# Altium PCB BEEHIVE.PcbDoc
Units mm, origin at the board's own origin, x right, y up, seen from the top; angles counter-clockwise.
Board outline 75 x 100 mm, 2 copper layers (Top Layer, Bottom Layer); 8 components, 8 nets, 61 pads, 0 vias.
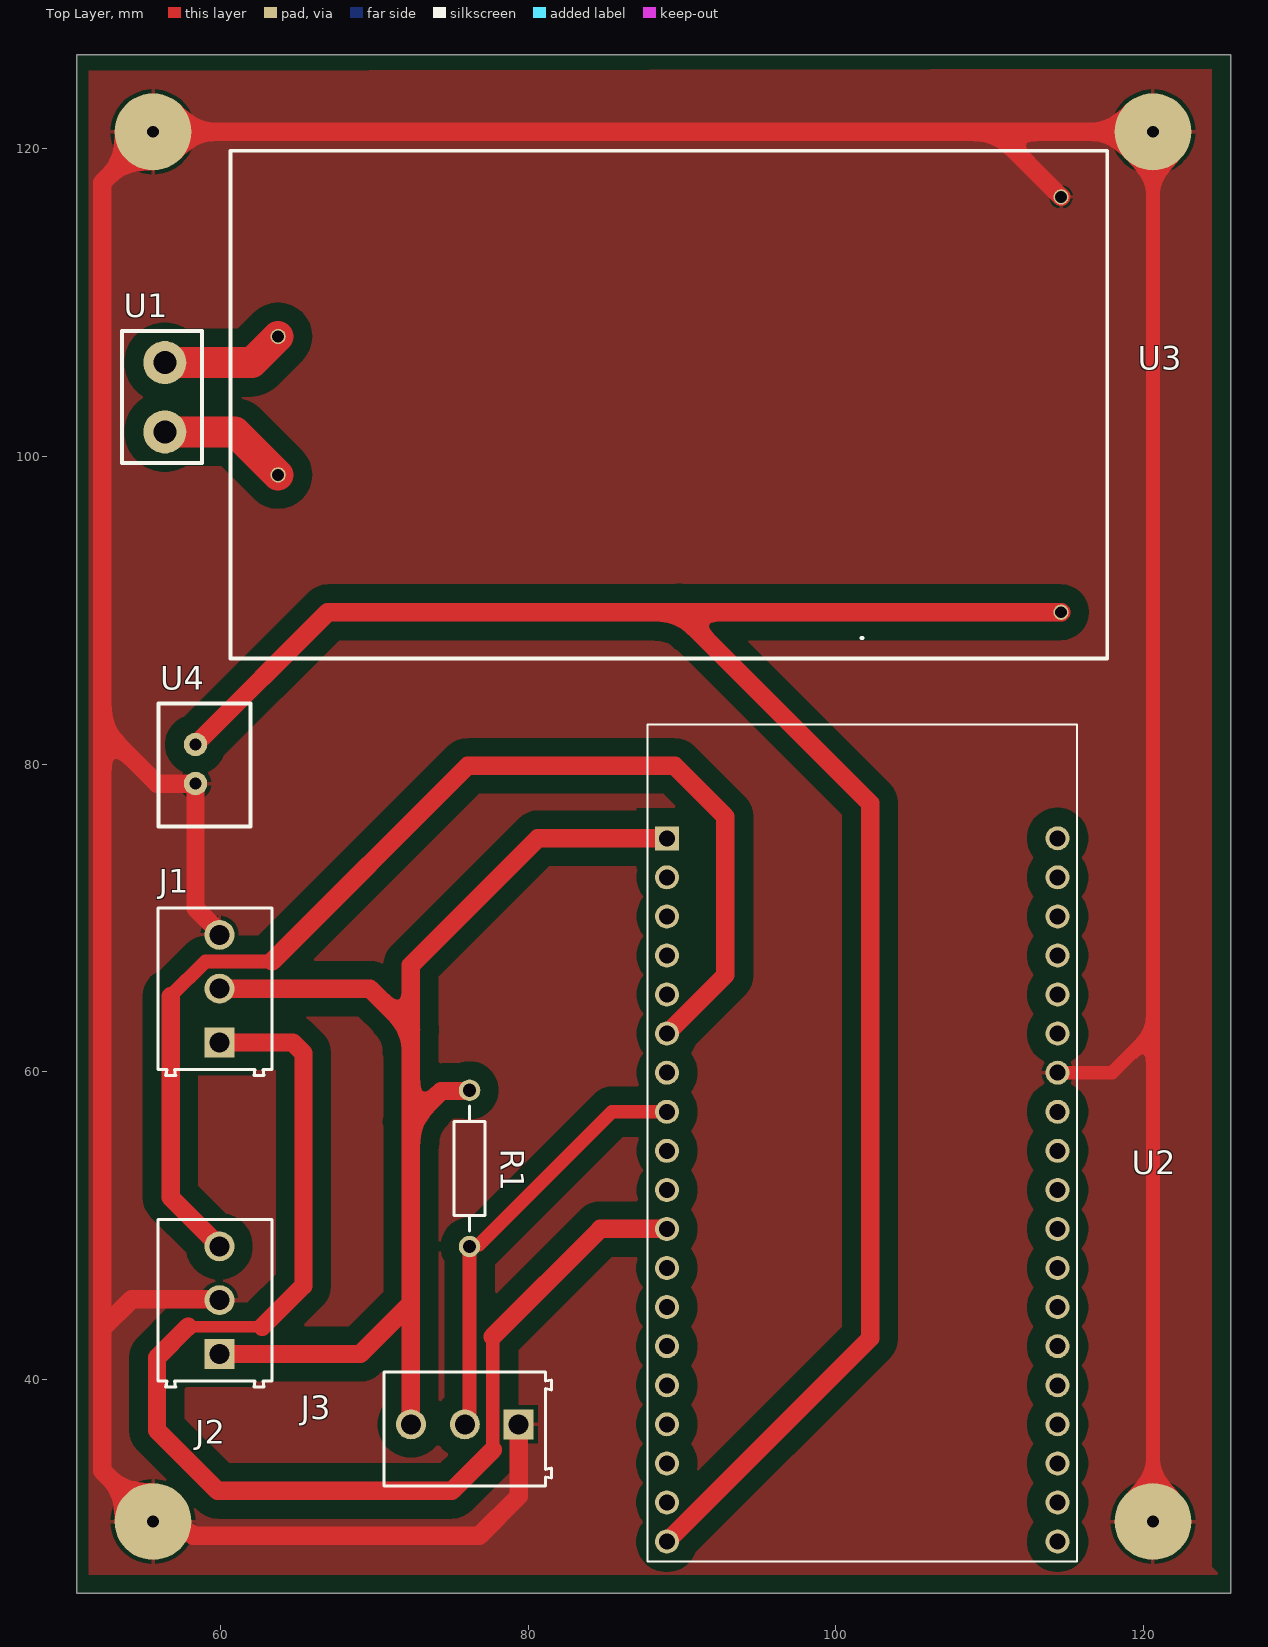
[diagram p0: Top Layer view]
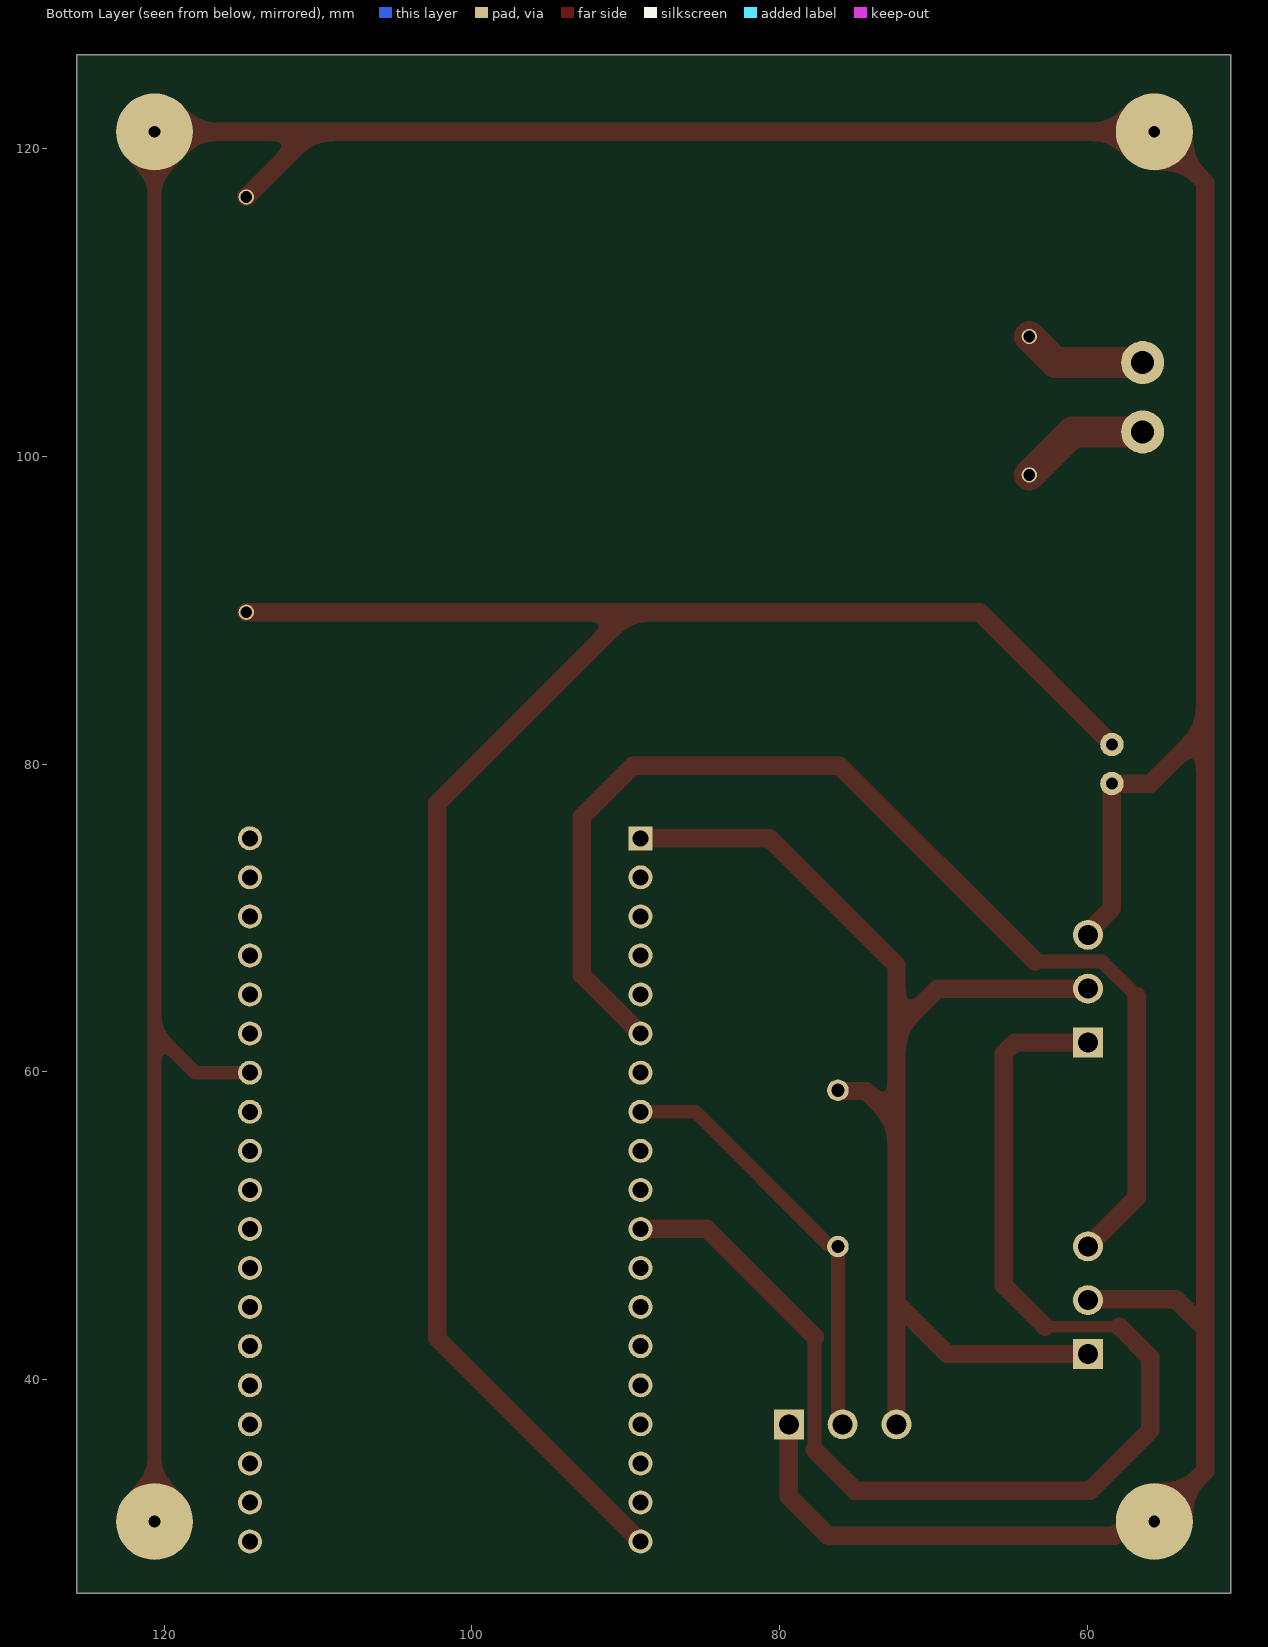
[diagram p1: Bottom Layer view, seen from below]

## Layer stack, top to bottom
Top Solder: solder mask 0.0102, Solder Resist, Dk 3.5
Top Layer: signal copper 0.0356
Dielectric 1: dielectric 0.32, FR-4, Dk 4.8
Bottom Layer: signal copper 0.0356
Bottom Solder: solder mask 0.0102, Solder Resist, Dk 3.5

## Board outline
50.673,26.111 50.673,126.111 125.673,126.111 125.673,26.111

## Design rules (kind name [scope] priority, off if disabled: settings)
Clearance [All] p1: gap=0.254 ignorepadtopadclearanceinfootprint=FALSE except(0: Arc-Hole Track-Hole SMDPad-Hole THPad-Hole Via-Hole Fill-Hole Poly-Hole Region-Hole Text-Hole; 1.2: Arc-Fill Arc-Poly Arc-Region Track-Fill Track-Poly Track-Region SMDPad-Fill SMDPad-Poly SMDPad-Region THPad-Fill THPad-Poly THPad-Region Via-Fill Via-Poly Via-Region; 1.25: Fill-Fill Fill-Poly Fill-Region Poly-Poly Poly-Region Region-Region)
PolygonConnect [All] p1: connectstyle=Relief reliefconductorwidth=0.254 reliefentries=4 polygonreliefangle="90 Angle" airgapwidth=0.254
RoutingLayers [All] p1: top layer_v5=TRUE bottom layer_v5=FALSE
RoutingVias [All] p1: holewidth=0.711 width=1.27 viastyle="Through Hole" minholewidth=0.711 minwidth=1.27 maxholewidth=0.711 maxwidth=1.27
SolderMaskExpansion [All] p1: expansion=0.102 istentingtop=FALSE
Width [All] p1: maxlimit=2 minlimit=0.75 preferedwidth=0.75 minimp=50.000000 maximp=50.000000 favimp=50.000000
29 further rules are at their usual default settings.

## Components (designator, comment, footprint, x,y, rotation, side; value= is the part's Value field where it differs from the comment)
J1 "DHT11 MODULE" 691214110003 59.644,65.405 r90 top
J2 "IR SENSOR" 691214110003 59.644,45.156 r90 top
J3 "DS18B20" 691214110003 75.89,36.784 r180 top
R1 "Res2" AXIAL-0.4 76.2,53.721 r270 top value=1K
U1 "PIN 1.5 2P" "PIN 1.5MM 2PIN" 57.277,105.41 r90 top
U2 "ESP32-DEVKITC-32D" MODULE_ESP32-DEVKITC-32D 101.727,55.424 r0 top
U3 "HLK-20M05" HLK-20M05 87.224,136.006 r270 top
U4 "2p JST 2.54mm pitch" PCBComponent_1 58.384,79.883 r270 top

## Footprints (in the part's own frame and the unit in brackets; to place one, negate y for a bottom-side part, rotate by r counter-clockwise, add the part's x,y. Pads: shape width x height; smd on the part's side, far side on the other; paste and mask are expansions set on the pad)
691214110003 [mm] "3.50 mm Horizontal Entry Modular, 3p"
  rect 1.95x1.95 hole 1.3: 1(-3.5,-0.3)
  round 1.95 hole 1.3: 2(0,-0.3) 3(3.5,-0.3)
  silkscreen extent -5.65,-3.7 5.25,3.7, body extent -5.7,-3.7 5.25,3.7, height 8.55
AXIAL-0.4 [mm] "Axial Device, Thru-Hole; 2 Leads; 0.4 in Pin Spacing"
  round 1.4 hole 0.85: 1(-5.08,0) 2(5.08,0)
  silkscreen extent -4.06,-1.02 4.06,1.02
HLK-20M05 [mm]
  round 1 hole 0.762: 1(28.2,-23.47) 2(37.2,-23.47) 3(19.129,27.432) 4(46.129,27.432)
  silkscreen extent 16.13,-26.57 49.13,30.43
MODULE_ESP32-DEVKITC-32D [mm]
  rect 1.56x1.56 hole 1.04: 1(-12.7,19.76)
  round 1.56 hole 1.04: 2(-12.7,17.22) 3(-12.7,14.68) 4(-12.7,12.14) 5(-12.7,9.6) 6(-12.7,7.06) 7(-12.7,4.52) 8(-12.7,1.98) 9(-12.7,-0.56) 10(-12.7,-3.1) 11(-12.7,-5.64) 12(-12.7,-8.18) 13(-12.7,-10.72) 14(-12.7,-13.26) 15(-12.7,-15.8) 16(-12.7,-18.34) 17(-12.7,-20.88) 18(-12.7,-23.42) 19(-12.7,-25.96) 20(12.7,19.76) 21(12.7,17.22) 22(12.7,14.68) 23(12.7,12.14) 24(12.7,9.6) 25(12.7,7.06) 26(12.7,4.52) 27(12.7,1.98) 28(12.7,-0.56) 29(12.7,-3.1) 30(12.7,-5.64) 31(12.7,-8.18) 32(12.7,-10.72) 33(12.7,-13.26) 34(12.7,-15.8) 35(12.7,-18.34) 36(12.7,-20.88) 37(12.7,-23.42) 38(12.7,-25.96)
  silkscreen extent -13.95,-27.25 13.95,27.15, body extent -13.97,-24.8 13.97,30.3, height 3.25
PCBComponent_1 [mil]
  round 60 hole 30: 1(-55,0) 2(45,0)
  silkscreen extent -160,-95 155,141
"PIN 1.5MM 2PIN" [mm]
  round 2.8 hole 1.5: 1(-3.81,0.889) 2(0.698,0.889)
  silkscreen extent -5.84,-1.52 2.76,3.68

## Part data
J1 J2 J3: library part CMP-1502-02466-1, "Serie 2141 - 3.50 mm Horizontal Entry Modular with Rising Cage Clamp WR-TBL, 3 pin", Manufacturer="Wurth Elektronik", Operating Temperature=-40to105degC, Package Reference=691214110003, Datasheet URL=http://katalog.we-online.de/em/datasheet/6912141100xx.pdf, Manufacturer URL=http://www.we-online.de, Mounting Technology=THT, Packaging=Box, Part Number=691214110003, Pin Number=3, Pitch=3.50mm, Publisher=WurthElektronik
R1: "Resistor", LatestRevisionDate=17-Jul-2002, LatestRevisionNote="Re-released for DXP Platform.", PackageDescription="Axial Device, Thru-Hole; 2 Leads; 0.4 in Pin Spacing", PackageReference=AXIAL-0.4, Published=8-Jun-2000, Publisher="Altium Limited"
U1: "BORNERA 1.5MM 2.8MM 2P"
U2: "EVAL BOARD FOR ESP-WROOM-32", Package=None, Availability=Warning, Check_prices=https://www.snapeda.com/parts/ESP32-DEVKITC-32D/Espressif%20Systems/view-part/2777395/?ref=eda, MF="Espressif Systems", MP=ESP32-DEVKITC-32D, Price=None, Purchase-URL=https://pricing.snapeda.com/search/part/ESP32-DEVKITC-32D/?ref=eda, SnapEDA_Link=https://www.snapeda.com/parts/ESP32-DEVKITC-32D/Espressif%20Systems/view-part/2777395/?ref=snap
U4: library part Component_1

## Free pads (board coordinates)
  round 5 hole 0.762: 1(55.626,121.111) 2(120.626,121.111) 3(55.626,30.763) 4(120.626,30.763)

## Nets (pads, with @x,y where several pads share a name; then routed paths per layer and width w, separated by ;. In a path a pad name is that pad's centre, name@x,y a point inside that pad or via, vN(x,y) a via of type N, cw(c..) or ccw(c..) an arc to the next point about the centre after c; other vN are vias at no path point)
3V3: J1.2 J2.1 J3.3 R1.1 U2.1 | length 81.9
  Top Layer w0.75: R1.1@76.153,58.754 R1.1
  Top Layer w1.2: J2.1 69.088,41.656 72.39,44.958 ; J1.2 69.723,65.405 72.39,62.738 ; J3.3 72.39,44.958 ; R1.1@76.153,58.754 74.375,58.754 72.39,56.769 ; U2.1 80.645,75.184 75.819,70.358 72.39,66.929 72.39,62.738 ; 72.39,44.958 72.39,56.769 ; 72.39,56.769 72.39,62.738
+Vo: U2.19 U3.4 U4.1 | length 130.9
  Top Layer w1.2: U4.1 66.981,89.877 89.815,89.877 ; U2.19 102.235,42.672 102.235,77.457 89.815,89.877 ; U3.4 89.815,89.877
GND: J1.3 J2.2 J3.1 pad.1 pad.2 pad.3 pad.4 U2.26 U3.3 U4.2 | length 318.1
  Top Layer w0.9: J1.3 J1.3@59.944,69.073 ; U2.26 117.983,59.944 120.626,62.587 ; pad.4 120.626,62.587 ; pad.2 120.626,62.587
  Top Layer w1.2: J2.2 59.882,45.218 54.235,45.218 52.324,43.307 ; J1.3@59.944,69.073 58.384,70.633 U4.2 55.88,78.74 52.324,82.296 ; J3.1 79.39,32.4 76.835,29.845 58.229,29.845 58.038,30.036 56.353,30.036 52.324,34.065 52.324,43.307 ; U3.3 110.421,121.111 ; pad.2 110.421,121.111 ; 52.324,43.307 52.324,82.296 ; 52.324,82.296 52.324,117.809 pad.1 110.421,121.111
IO27: J1.1 U2.11 | length 83.2
  Top Layer w0.75: 57.899,43.434 62.738,43.434
  Top Layer w0.9: 77.711,35.42 77.711,42.786
  Top Layer w1.2: 57.899,43.434 55.88,41.415 55.88,36.703 59.817,32.766 75.057,32.766 77.711,35.42 ; J1.1 64.702,61.905 65.405,61.202 65.405,46.101 62.738,43.434 ; 77.711,42.786 84.709,49.784 U2.11
IO33: J3.2 R1.2 U2.8 | length 28.1
  Top Layer w0.75: J3.2 J3.2@76.2,37.394 ; R1.2 76.324,48.765 R1.2@76.832,48.765
  Top Layer w0.9: J3.2@76.2,37.394 R1.2 ; R1.2@76.832,48.765 85.471,57.404 U2.8
IO35: J2.3 U2.6 | length 76.9
  Top Layer w0.9: 56.769,64.919 59.033,67.183 63.373,67.183
  Top Layer w1.2: 56.769,64.919 56.769,51.831 J2.3 ; 63.373,67.183 76.073,79.883 89.535,79.883 92.837,76.581 92.837,66.294 U2.6
NetU1_1: U1.1 U3.2 | length 8.5
  Top Layer w2: U1.1 60.96,101.6 U3.2
NetU1_2: U1.2 U3.1 | length 8.1
  Top Layer w2: U1.2 62.056,106.108 U3.1
pads on no net: U2.2 U2.3 U2.4 U2.5 U2.7 U2.9 U2.10 U2.12 U2.13 U2.14 U2.15 U2.16 U2.17 U2.18 U2.20 U2.21 U2.22 U2.23 U2.24 U2.25 U2.27 U2.28 U2.29 U2.30 U2.31 U2.32 U2.33 U2.34 U2.35 U2.36 U2.37 U2.38

## Polygon pours and split planes (outlines as drawn)
GND on Top Layer "GND_L01_P000" (solid, pour order 0): 51.435,125.095 51.435,27.305 124.968,27.305 124.46,27.813 124.46,125.222

## Silkscreen, mask and mechanical layers (free items; w line width, h text height)
Mechanical 1:
  the board outline again, w0.254